# Allegro board cc2531ud.brd
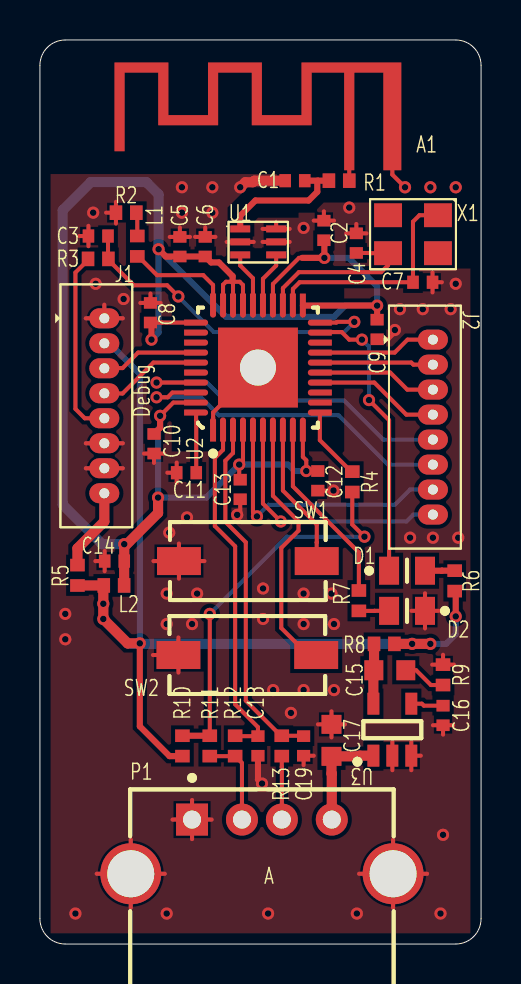
[diagram p0: board, top side]
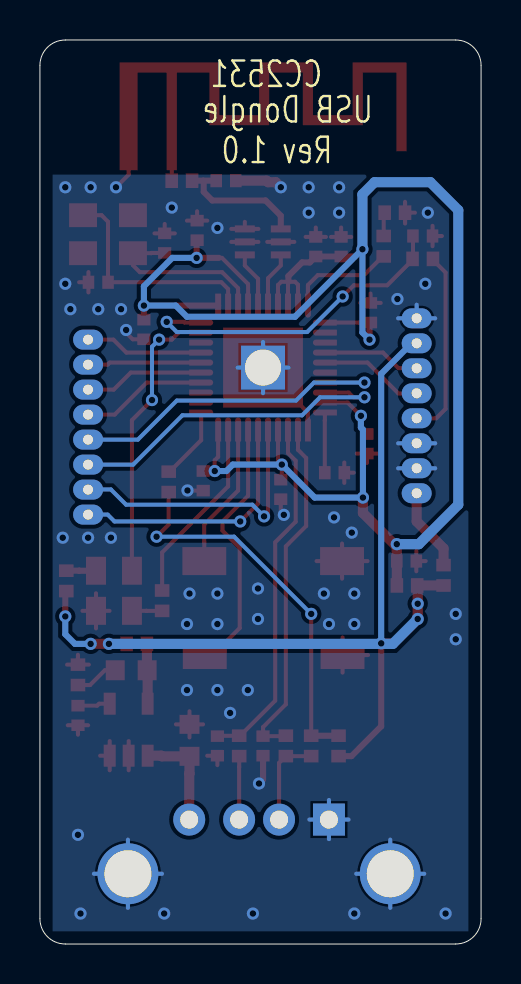
[diagram p1: board, bottom side, seen from below]

Outline 22.1 x 45.21 mm; copper layers: TOP, BOTTOM. Coordinates in mm from the lower left corner of the outline.
Outline path: 0,43.94 0,1.27 arc(0.37,0.37) 1.27,0 20.83,0 arc(21.73,0.37) 22.1,1.27 22.1,43.94 arc(21.73,44.84) 20.83,45.21 1.27,45.21 arc(0.37,44.84) 0,43.94

## Placement (name value [footprint] x y rotation side)
A1  -  [ANTENNA_IIFA_1_LEFT]  15.49 39.37 90 top
C1  C_0P5_0402_NP0_B_50  [C_0402]  12.78 38.18 180 top
C2  C_100N_0402_X5R_K_10  [C_0402]  14.22 35.69 90 top
C3  C_1N_0402_NP0_J_50  [C_0402]  2.92 35.41 180 top
C4  C_27P_0402_NP0_J_50  [C_0402]  15.85 35.05 90 top
C5  C_220P_0402_NP0_J_50  [C_0402]  7.01 34.87 90 top
C6  C_100N_0402_X5R_K_10  [C_0402]  8.28 34.87 90 top
C7  C_27P_0402_NP0_J_50  [C_0402]  19.18 33.1 0 top
C8  C_100N_0402_X5R_K_10  [C_0402]  5.54 31.57 90 top
C9  C_100N_0402_X5R_K_10  [C_0402]  16.89 30.73 270 top
C10  C_1U_0402_X5R_K_6P3  [C_0402]  5.71 25.02 270 top
C11  C_1U_0402_X5R_K_6P3  [C_0402]  7.34 23.57 180 top
C12  C_100N_0402_X5R_K_10  [C_0402]  13.92 23.16 270 top
C13  C_10P_0402_NP0_J_50  [C_0402]  10.03 22.73 270 top
C14  C_2U2_0402_X5R_M_4VDC  [C_0402]  3.73 19.15 180 top
C15  C_4U7_0603_X5R_K_6  [C_0603]  17.53 13.69 0 top
C16  -  [C_0402]  20.19 11.43 270 top
C17  C_1U_0603_X5R_L_6P3  [C_0603]  14.61 10.19 90 top
C18  C_47P_0402_NP0_J_50  [C_0402]  10.92 9.91 270 top
C19  C_47P_0402_NP0_J_50  [C_0402]  13.21 9.91 270 top
D1  LED_Green  [LEDC_0805]  18.39 18.67 0 top
D2  LED_Red  [LEDC_0805]  18.39 16.66 180 top
J1  DEBUG  [SHDRV8W50P0_125]  3.23 31.29 270 top
J2  IO  [SHDRV8W50P0_125]  19.68 30.23 270 top
L1  L_6N8_0402_J  [R_0402]  4.88 34.9 270 top
L2  L_BEAD_102_0402  [R_0402]  3.71 17.93 180 top
NOREF  -  []  -64.01 -93.98 0 top
P1  USB_A  [USBA]  7.62 6.22 0 top
R1  R_0_0402  [R_0402]  14.99 38.18 180 top
R2  R_56K_0402_F  [R_0402]  4.32 36.58 180 top
R3  R_2K2_0402_G  [R_0402]  2.92 34.26 0 top
R4  R_0_0402  [R_0402]  15.65 23.11 90 top
R5  -  [R_0402]  1.88 18.44 270 top
R6  R_270_0402_F  [R_0402]  20.78 18.16 270 top
R7  R_270_0402_F  [R_0402]  15.98 17.17 90 top
R8  R_0_0402  [R_0402]  17.25 15.01 0 top
R9  R_2_0402_F  [R_0402]  20.19 13.46 90 top
R10  -  [R_0402]  7.14 9.91 90 top
R11  R_1K5_0402_G  [R_0402]  8.51 9.91 270 top
R12  R_33_0402_G  [R_0402]  9.78 9.91 90 top
R13  R_33_0402_G  [R_0402]  12.12 9.91 90 top
SW1  PUSH_BUTTON_SPST  [SW7939X216N]  10.41 19.15 0 top
SW2  PUSH_BUTTON_SPST  [SW7939X216N]  10.39 14.45 0 top
U1  -  [2450BM15A0002]  10.03 35.76 0 top
U2  CC2531  [S-PVQFN-M40]  10.92 28.83 90 top
U3  TPS76933  [SOT95P280X145-5N]  17.65 10.72 90 top
X1  OSC_32M  [XTAL_SMD_3_2X2_5]  19.94 36.45 180 top

## Library data of the parts
A1 = ANTENNA
C1-C19 = CAP NP
D1 D2 = LED
J1 J2 = HEADER 8
L1 L2 = INDUCTOR
P1 = USB_A_1
R1-R13 = R2
SW1 SW2 = SW PUSHBUTTON-SPST
U1 = 2450BM15A0002
U2 = CC2530
U3 = TPS76933
X1 = OSC_32M

## Footprints (pads in the part's own frame, mm; a bottom-side part is the same pattern mirrored in y, then rotated)
2450BM15A0002
  rect 1x0.35 smd: 1(0,0) 2(0,-0.65) 3(0,-1.3) 4(1.8,-1.3) 5(1.8,-0.65) 6(1.8,0)
ANTENNA_IIFA_1_LEFT
  rect 1.143x0.381 smd: 1(0,0) 2(0,-2.159)
C_0402
  rect 0.58x0.66 smd: 1(-0.49,0) 2(0.49,0)
C_0603
  rect 0.95x1 smd: 1(-0.8,0) 2(0.8,0)
LEDC_0805
  rect 1x1.4 smd: A(0.9,0) C(-0.9,0)
R_0402
  rect 0.63x0.73 smd: 1(-0.51,0) 2(0.51,0)
S-PVQFN-M40
  custom 1.2x0.3 smd: 1(-3.1,2.25) 2(-3.1,1.75) 3(-3.1,1.25) 4(-3.1,0.75) 5(-3.1,0.25) 6(-3.1,-0.25) 7(-3.1,-0.75) 8(-3.1,-1.25) 9(-3.1,-1.75) 10(-3.1,-2.25) 21(3.1,-2.25) 22(3.1,-1.75) 23(3.1,-1.25) 24(3.1,-0.75) 25(3.1,-0.25) 26(3.1,0.25) 27(3.1,0.75) 28(3.1,1.25) 29(3.1,1.75) 30(3.1,2.25)
  custom 0.3x1.2 smd: 11(-2.25,-3.1) 12(-1.75,-3.1) 13(-1.25,-3.1) 14(-0.75,-3.1) 15(-0.25,-3.1) 16(0.25,-3.1) 17(0.75,-3.1) 18(1.25,-3.1) 19(1.75,-3.1) 20(2.25,-3.1) 31(2.25,3.1) 32(1.75,3.1) 33(1.25,3.1) 34(0.75,3.1) 35(0.25,3.1) 36(-0.25,3.1) 37(-0.75,3.1) 38(-1.25,3.1) 39(-1.75,3.1) 40(-2.25,3.1)
  rect 4x4 hole 1.8: 41(0,0)
SHDRV8W50P0_125
  oval 1x1.5 hole 0.5: 1(0,0) 2(1.25,0) 3(2.5,0) 4(3.75,0) 5(5,0) 6(6.25,0) 7(7.5,0) 8(8.75,0)
SOT95P280X145-5N
  rect 1.1x0.6 smd: 1(-1.3,0.95) 2(-1.3,0) 3(-1.3,-0.95) 4(1.3,-0.95) 5(1.3,0.95)
SW7939X216N
  rect 2.2x1.4 smd: 1(-3.45,0) 2(3.45,0)
USBA
  rect 1.6x1.6 hole 0.9: 1(0,0)
  round 1.6 hole 0.9: 2(2.5,0) 3(4.5,0) 4(7,0)
  round 3.05 hole 2.35: M1(-3.07,-2.71) M2(10.07,-2.71)
XTAL_SMD_3_2X2_5
  rect 1.397x1.194 smd: 1(0,0) 2(2.5,0) 3(2.5,1.9) 4(0,1.9)

## Nets
3.3V: J1.2 L2.2 R5.2 R6.2 R8.2 R10.1
GND_SIGNAL: A1.2(A2) C1.2 C2.2 C3.2 C4.2 C5.2 C6.2 C7.2 C8.2 C9.2 C10.2 C11.2 C12.2 C13.2 C14.2 C16.2 C17.2 C18.2 C19.2 D2.C(CATHODE) J1.1 J1.6 J1.7 P1.1(GND) P1.M1(SHIELD1) P1.M2(SHIELD2) R2.2 R9.2 SW1.1 SW2.1 U1.2(GND#2) U1.5(GND#5) U1.6(GND#6) U2.1(DGND_USB) U2.41(GND) U3.2(GND) U3.3(E\N\)
VBUS: C17.1 P1.4(VBUS) U3.1(IN)
VCC: C2.1 C5.1 C6.1 C8.1 C9.1 C10.1 C12.1 C13.1 C14.1 L2.1 U2.4(DVDD_USB) U2.10(DVDD) U2.21(AVDD5/AVDD_SOC) U2.24(AVDD3) U2.27(AVDD2) U2.28(AVDD1) U2.29(AVDD4) U2.31(AVDD_GUARD) U2.39(AVDD_DREG)
VCC_EXT: J1.8 R5.1
2: X1.2
4: X1.4
P0_0: D1.C(CATHODE) U2.19(P0_0)
P0_2: J2.1 U2.17(P0_2)
P0_3: J2.2 U2.16(P0_3)
P0_4: J2.3 U2.15(P0_4)
P0_5: J2.4 U2.14(P0_5)
P1_0/LED: R4.2 U2.11(P1_0)
P1_1/LED: R7.2 U2.9(P1_1)
P1_2: SW1.2 U2.8(P1_2)
P1_3: SW2.2 U2.7(P1_3)
P1_4: J2.8 U2.6(P1_4)
P1_5: J2.7 U2.5(P1_5)
P1_6: J2.6 U2.38(P1_6)
P1_7: J2.5 U2.37(P1_7)
P2_1: J1.4 U2.35(P2_1)
P2_2: J1.3 U2.34(P2_2)
PA_DM: C19.1 R13.2 U2.3(USB_M)
PA_DP: C18.1 R12.2 U2.2(USB_P)
RESET_N: J1.5 R3.1
N00275: C16.1 U3.4(NC)
N00326: C15.2 R9.1
N00371: C15.1 R8.1 U3.5(OUT)
N02444: U1.4(BAL2) U2.25(RF_P)
N02448: U1.3(BAL1) U2.26(RF_N)
N02625: C1.1 R1.2 U1.1(UNBAL)
N03169: L1.2 U2.30(RBIAS)
N03221: L1.1 R2.1
N03398: C11.1 U2.40(DCOUPL)
N03464: C4.1 U2.23(XOSC32M_Q2) X1.3
N03499: C7.1 U2.22(XOSC32M_Q1) X1.1
N03682: C3.1 R3.2 U2.20(RESET_N)
N05214: P1.3(D-) R13.1
N05218: P1.2(D+) R11.2 R12.1
N05560: R4.1 R10.2 R11.1
N06374: D2.A(ANODE) R7.1
N06378: D1.A(ANODE) R6.1
N026150: A1.1(A1) R1.1

Pads without a net: U2 12 13 18 32 33 36

## Via types
v1: diameter 0.61, hole 0.33, TOP to BOTTOM, 73 vias

## Routing (per net, layer and track width the routed paths; a pad name or vN(x,y) marks a point on that pad's centre or on a via; arc(x,y) is an arc through that point)
3.3V: length 49.6
  TOP w0.305: R10.1 6.49,9.4 5,10.89 v1(5,15.04) ; v1(20.83,16.38) 20.83,17.6 R6.2
  TOP w0.508: R5.2 3.2,17.93 ; 3.2,17.93 L2.2 ; 3.2,17.93 3.17,17.91 v1(3.17,17.02) v1(3.17,16.26) 4.39,15.04 v1(5,15.04) ; v1(19.56,15.01) v1(18.64,15.01) R8.2
  BOTTOM w0.305: v1(5,15.04) 5,28.51 3.48,30.04 J1.2 ; v1(20.83,16.38) 20.83,15.49 20.35,15.01 v1(19.56,15.01)
  BOTTOM w0.508: v1(3.17,16.26) 4.42,15.01 v1(18.64,15.01)
GND_SIGNAL: length 106.6
  TOP w0.203: C2.2 14.22,36.65 ; C2.2 14.73,36.18 ; C2.2 13.72,36.18 ; P1.M2 17.69,5.22 ; P1.M2 15.99,3.51 ; P1.M2 17.69,1.81 ; P1.M2 19.39,3.51 ; 6.38,23.57 C11.2 ; C11.2 6.85,23.06 ; C11.2 6.85,24.08 ; D2.C 19.29,17.54 ; D2.C 19.97,16.66 ; D2.C 19.29,15.78 ; D2.C 18.61,16.66 ; 3.31,36.58 R2.2 ; R2.2 3.81,37.12 ; R2.2 3.81,36.03 ; R9.2 20.19,14.47 ; R9.2 19.65,13.97 ; R9.2 20.74,13.97 ; 2.78,19.15 C14.2 ; C14.2 3.24,19.66 ; C14.2 3.24,18.64 ; C17.2 14.61,11.64 ; C17.2 15.28,10.99 ; C17.2 14.61,10.33 ; C17.2 13.93,10.99 ; 2.3,23.79 J1.7 4.15,23.79 ; 2.85,3.51 P1.M1 ; P1.M1 4.55,5.22 ; P1.M1 6.25,3.51 ; P1.M1 4.55,1.81 ; C7.2 20.14,33.1 ; C7.2 19.67,32.59 ; C7.2 19.67,33.6 ; U1.6 12.51,35.76 ; U1.6 11.83,36.12 ; U1.6 11.15,35.76 ; 5.03,32.06 C8.2 ; C8.2 5.54,32.53 ; C8.2 6.05,32.06 ; 17.65,10.15 U3.2 17.65,8.69 ; C3.2 2.43,35.92 ; C3.2 2.43,34.9 ; C3.2 1.96,35.41 ; C6.2 8.79,35.36 ; C6.2 7.77,35.36 ; C6.2 8.28,35.83 ; J1.1 3.23,31.97 ; J1.1 4.15,31.29 ; J1.1 2.3,31.29 ; v1(17.78,30.71) 17.78,30.57 17.45,30.24 C9.2 ; 12.51,35.11 U1.5 11.15,35.11 ; P1.1 7.62,7.2 ; P1.1 7.62,5.24 ; P1.1 8.6,6.22 ; P1.1 6.64,6.22 ; 13.72,9.42 C19.2 13.21,8.95 ; C5.2 7.52,35.36 ; C5.2 6.5,35.36 ; C5.2 7.01,35.83 ; v1(14.71,22.68) 14.7,22.67 C12.2 ; SW1.1 6.96,20.03 ; SW1.1 5.69,19.15 ; SW1.1 8.24,19.15 ; SW1.1 6.96,18.27 ; C10.2 6.22,24.53 ; C10.2 5.21,24.53 ; C10.2 5.71,24.06 ; 2.3,25.04 J1.6 4.15,25.04 ; A1.2 17.65,38.48 v1(18.29,37.85) ; 18.6,8.69 U3.3 ; U3.3 19.08,9.42 ; U3.3 18.6,10.15 ; C4.2 15.85,36.01 ; C4.2 16.36,35.54 ; C4.2 15.34,35.54 ; C13.2 10.03,21.62 v1(9.88,21.46) ; 5.66,14.45 SW2.1 ; SW2.1 6.94,13.57 ; SW2.1 6.94,15.33 ; 19.68,10.94 C16.2 ; C16.2 20.19,10.47 ; C16.2 20.7,10.94 ; U2.1 8.67,26.32 8.68,26.32 8.68,26.58 U2.41 ; 10.71,35.11 U1.2 9.35,35.11
  TOP w0.305: C18.2 10.92,8.23 v1(11.13,8.03)
  TOP w0.508: C1.2 10.74,38.18 10.67,38.1 10.29,38.1 v1(10.03,37.85)
  BOTTOM w0.203: 15.99,3.51 P1.M2 ; P1.M2 17.69,5.22 ; P1.M2 17.69,1.81 ; P1.M2 19.39,3.51 ; 4.55,1.81 P1.M1 ; P1.M1 6.25,3.51 ; P1.M1 2.85,3.51 ; P1.M1 4.55,5.22 ; 6.64,6.22 P1.1 ; P1.1 7.62,7.2 ; P1.1 8.6,6.22 ; P1.1 7.62,5.24 ; U2.41 10.92,30.11 ; U2.41 10.92,27.55 ; U2.41 12.2,28.83 ; U2.41 9.64,28.83 ; 2.3,31.29 J1.1 ; J1.1 3.23,31.97 ; J1.1 4.15,31.29 ; 4.15,25.04 J1.6 2.3,25.04 ; 4.15,23.79 J1.7 2.3,23.79
  vias: v1(1.27,16.51) v1(1.27,15.24) v1(1.78,1.52) v1(2.67,36.58) v1(2.79,33.02) v1(4.19,32.26) v1(6.35,17.53) v1(6.35,16) v1(6.35,1.52) v1(6.48,20.57) v1(7.11,37.85) v1(7.11,36.58) v1(7.37,21.34) v1(7.62,16) v1(7.87,17.53) v1(8.64,37.85) v1(8.64,36.58) v1(11.18,17.78) v1(11.18,16.26) v1(11.43,1.52) v1(11.68,12.7) v1(12.57,11.56) v1(13.21,35.81) v1(13.21,17.53) v1(13.21,16) v1(13.21,12.7) v1(14.61,17.53) v1(14.73,16) v1(14.73,12.7) v1(15.49,36.83) v1(15.88,1.52) v1(18.03,31.75) v1(18.54,20.32) v1(19.18,31.75) v1(19.56,37.85) v1(19.68,20.32) v1(20.07,1.52) v1(20.19,5.46) v1(20.57,31.75) v1(20.83,37.85) v1(20.83,33.02) v1(20.95,20.32)
VBUS: length 5.3
  TOP w0.508: U3.1 16.02,9.42 15.99,9.39 C17.1 14.61,8.53 14.62,8.51 P1.4
VCC: length 96.1
  TOP w0.203: 9.65,33.12 10.01,33.12 10.17,32.96 U2.27 ; 9.65,33.12 9.67,33.1 U2.28 ; 9.65,33.12 9.32,33.12 9.17,32.97 U2.29 ; C8.1 6.1,31.08 6.1,31.08 U2.31 ; v1(6.02,26.42) 6.68,27.08 U2.39 ; C13.1 9.98,23.27 v1(9.98,23.98) 10.17,24.17 U2.4 ; v1(13.34,23.65) 13.34,24.19 13.17,24.36 U2.10 ; U2.24 11.67,33.01 12.98,34.32 13.13,34.32
  TOP w0.305: v1(5.59,30.23) 5.59,31.03 C8.1 ; U2.21 v1(16.89,31.93) C9.1 ; v1(6.02,26.42) 6.02,25.81 C10.1 ; v1(13.34,23.65) C12.1 ; 9.65,33.12 9.65,33.4 8.97,34.09 8.58,34.09 C6.1 C5.1 6.31,34.38 v1(5.94,34.75) ; C2.1 14.25,35.17 v1(14.25,34.32) 13.13,34.32
  TOP w0.508: 4.22,19.86 C14.1 4.22,19.15 L2.1 ; 4.22,19.86 v1(4.22,20) ; 4.22,19.86 5.92,21.56 v1(5.92,22.33)
  BOTTOM w0.305: v1(13.34,23.65) 12.76,23.65 12.44,23.98 v1(9.98,23.98) 8.33,22.33 v1(5.92,22.33) 5.92,25.73 6.02,25.83 v1(6.02,26.42) ; v1(5.59,30.23) 5.94,30.58 v1(5.94,34.75) 9.32,31.37 14.73,31.37 15.29,31.93 v1(16.89,31.93) 16.89,32.89 15.47,34.32 v1(14.25,34.32)
  BOTTOM w0.508: v1(5.94,34.75) 5.94,37.49 5.33,38.1 2.54,38.1 1.14,36.7 1.14,21.97 3.12,20 v1(4.22,20)
VCC_EXT: length 4.1
  TOP w0.508: R5.1 1.88,19.79 3.23,21.13 J1.8
P0_0: length 14.4
  TOP w0.203: D1.C 17.49,26.2 v1(16.48,27.2) ; v1(16.13,30.23) 15.49,30.23 15.12,30.6 14.05,30.6 U2.19
  BOTTOM w0.203: v1(16.13,30.23) 16.48,29.87 v1(16.48,27.2)
P0_2: length 5.9
  TOP w0.203: J2.1 18.41,30.23 17.77,29.58 U2.17
P0_3: length 5.7
  TOP w0.203: J2.2 18.71,28.98 18.6,29.08 U2.16
P0_4: length 6
  TOP w0.203: J2.3 18.4,27.73 17.55,28.58 U2.15
P0_5: length 6.3
  TOP w0.203: J2.4 18.36,26.48 16.75,28.08 U2.14
P1_0/LED: length 3.7
  TOP w0.203: R4.2 15.6,23.62 14.02,25.2 U2.11
P1_1/LED: length 9.4
  TOP w0.203: R7.2 15.98,19.58 12.67,22.89 U2.9
P1_2: length 7.3
  TOP w0.203: U2.8 12.17,22.68 13.87,20.98 13.87,20.08 13.86,20.08 SW1.2
P1_3: length 13.1
  TOP w0.203: SW2.2 13.44,14.45 12.09,15.8 12.09,19.81 12.95,20.68 12.95,21.13 11.67,22.41 U2.7
P1_4: length 12.7
  TOP w0.203: U2.6 11.17,22.03 v1(12.06,21.13)
  BOTTOM w0.203: J2.8 18.71,21.48 18.36,21.13 v1(12.06,21.13)
P1_5: length 13.8
  TOP w0.203: v1(10.87,21.39) 10.67,21.59 U2.5
  BOTTOM w0.203: J2.7 19.68,22.73 18.54,22.73 17.78,21.97 11.46,21.97 v1(10.87,21.39)
P1_6: length 17.3
  TOP w0.203: v1(5.84,27.34) 6.4,27.34 6.64,27.58 U2.38
  BOTTOM w0.203: J2.6 17.43,23.98 14.96,26.44 8.97,26.44 8.06,27.34 v1(5.84,27.34)
P1_7: length 17
  TOP w0.203: U2.37 v1(5.84,28.08)
  BOTTOM w0.203: J2.5 17.19,25.23 15.24,27.18 9.27,27.18 8.37,28.08 v1(5.84,28.08)
P2_1: length 5.2
  TOP w0.203: J1.4 3.23,27.53 4.14,27.53 5.69,29.08 U2.35
P2_2: length 4.9
  TOP w0.203: U2.34 4.92,29.58 4.14,28.8 3.24,28.8 J1.3
PA_DM: length 17.8
  TOP w0.203: U2.3 9.67,24.56 9.29,24.17 9.29,21.12 10.31,20.09 10.31,12.17 12.07,10.42 R13.2 13.19,10.42 C19.1
PA_DP: length 17.5
  TOP w0.203: U2.2 9.17,24.72 8.76,24.31 8.76,20.9 9.78,19.89 9.78,11.99 10.92,10.85 C18.1 9.8,10.4 R12.2
RESET_N: length 9.4
  TOP w0.203: R3.1 2.41,34.21 1.78,33.58 1.78,26.76 2.25,26.29 J1.5
N00275: length 1.6
  TOP w0.203: C16.1 19.23,11.92 19.13,12.02 U3.4
N00326: length 2.2
  TOP w0.203: C15.2 18.85,13.69 19.59,12.95 R9.1
N00371: length 3
  TOP w0.508: R8.1 16.74,13.7 C15.1 16.7,13.67 U3.5
N02444: length 2.8
  TOP w0.203: U2.25 11.17,33.27 11.83,33.93 U1.4
N02448: length 2.8
  TOP w0.203: U1.3 10.03,33.93 10.67,33.3 U2.26
N02625: length 6.8
  TOP w0.305: U1.1 10.03,36.42 10.79,37.19 13.46,37.19 13.89,37.62 13.89,38.15 13.92,38.18 ; 13.92,38.18 R1.2 ; 13.92,38.18 C1.1
N03169: length 5.4
  TOP w0.203: L1.2 4.93,34.39 5.86,33.45 8.18,33.45 8.67,32.96 U2.30
N03221: length 1.2
  TOP w0.203: R2.1 4.88,36.53 L1.1
N03398: length 3
  TOP w0.203: U2.40 7.82,26.2 7.83,26.19 C11.1
N03464: length 8.8
  TOP w0.203: C4.1 16.5,34.56 16.51,34.55 X1.3 17.44,33.95 17.09,33.6 12.97,33.6 12.17,32.8 U2.23
N03499: length 11.4
  TOP w0.203: U2.22 12.67,32.76 13.01,33.1 C7.1 18.69,36.12 19.01,36.45 X1.1
N03682: length 17
  TOP w0.203: C3.1 3.41,34.28 R3.2 3.43,34.21 4.7,32.94 6.38,32.94 v1(6.93,32.38) ; U2.20 14.85,31.08 14.89,31.11 v1(15.75,31.11)
  BOTTOM w0.203: v1(6.93,32.38) 8.71,30.61 15.24,30.61 v1(15.75,31.11)
N05214: length 3.2
  TOP w0.203: P1.3 12.12,8.85 12.12,8.85 R13.1
N05218: length 4.6
  TOP w0.203: P1.2 10.12,9.05 R12.1 R11.2
N05560: length 19.3
  TOP w0.203: v1(8.51,16.51) R11.1 ; R4.1 15.65,20.98 v1(16.26,20.37)
  TOP w0.305: R10.2 R11.1
  BOTTOM w0.203: v1(8.51,16.51) 12.37,20.37 v1(16.26,20.37)
N06374: length 1.5
  TOP w0.203: D2.A 16.76,16.66 16.76,16.66 R7.1
N06378: length 1.5
  TOP w0.305: D1.A 20.13,18.67 20.13,18.67 R6.1
N026150: length 1.2
  TOP w0.203: R1.1 15.49,38.18 A1.1

## Copper pours and planes (outline as drawn; the poured copper is in the pictures)
GND_SIGNAL on TOP: 0.53,0.53 0.53,38.51 16,38.51 16,37.85 16.76,37.08 20.83,37.08 20.83,35.81 19.05,35.81 19.05,35.31 20.83,35.31 20.83,33.78 21.56,33.78 21.56,0.53 ; 9 cut-outs
GND_SIGNAL on BOTTOM: 21.46,38.48 0.64,38.48 0.64,0.64 21.46,0.64 ; 5 cut-outs
N026150 on TOP (solid shape): 6.44,41.45 8.42,41.45 8.42,44.09 11.12,44.09 11.12,41.45 13.1,41.45 13.1,44.09 18.1,44.09 18.1,38.7 17.2,38.7 17.2,43.58 15.75,43.58 15.75,38.7 15.24,38.7 15.24,43.58 13.61,43.58 13.61,40.95 10.61,40.95 10.61,43.58 8.93,43.58 8.93,40.95 5.93,40.95 5.93,43.58 4.24,43.58 4.24,39.65 3.74,39.65 3.74,44.09 6.44,44.09

## Text on the board
Ref Des/Silkscreen Bottom: USB Dongle | Rev 1.0 | CC2531
Ref Des/Silkscreen Top: A | Debug
DISPLAY_TOP: FIGURE | SIZE | 13.0 | 19.69 | 35.43 | 70.87 | 92.52 | DRILL CHART: TOP to BOTTOM | ALL UNITS ARE IN MILS | PLATED | QTY | 73 | 16 | 4 | 1 | 2
